# EAGLE board Edge-Lit Clock v3.1 (EAGLE 7.6.0)
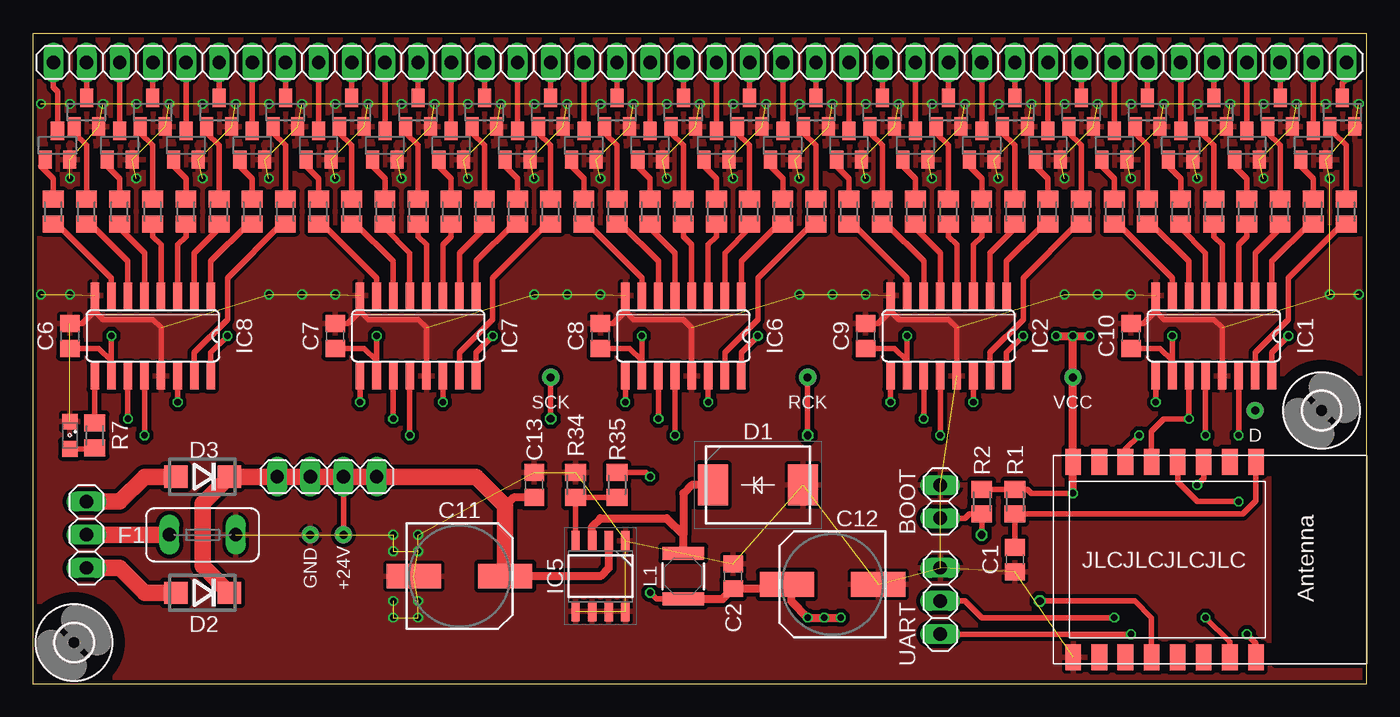
[diagram p0: board, top side]
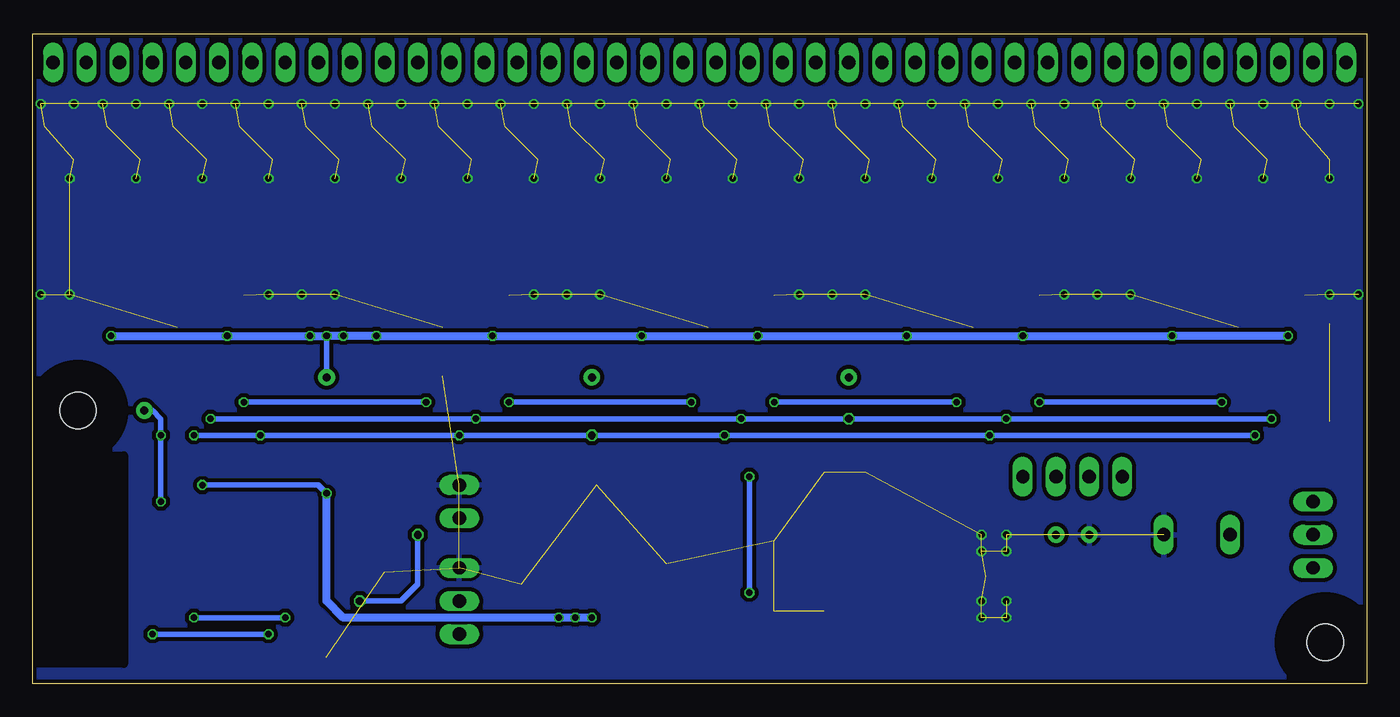
[diagram p1: board, bottom side, seen from below]

Size 102.22 x 49.84 mm. Coordinates in mm from the lower left corner, seen from the top.
Outline: 0,0 102.21,0 102.21,49.84 0,49.84 0,0
Copper layers (1*16): Top 0.035559375mm / dielectric 1.6mm / Bottom 0.035559375mm
Design rules "jlcpcb2layer": minimum track width 5mil, minimum drill 12mil, track to track 5mil, track to pad 5mil, pad to pad 5mil, via to via 5mil, smd to smd 5mil, copper to edge 8mil, drill to drill 6mil, minimum pad ring 5mil, minimum via ring 3mil, stop-mask expansion 2.5mil, vias tented up to drill 0mil, thermal gap 10mil

## Footprints (pad centres in the part's own frame; a part is rotated, then mirrored left to right if it is on the bottom)
PAD-024 = drill 0.61 pad 1.27: 1 0,0
C0805 = smd 1.3 x 1.5: 1 -0.95,0; 2 0.95,0
SANYO-OSCON_SMD_E7 = smd 4.15 x 1.9: + 3.5,0; - -3.5,0
DIOM7959X262N = smd 2.3 x 3.15: 1 -3.45,0; 2 3.45,0
DO214BA = smd 1.8 x 1.7: A 2.05,0; C -2.05,0
TE5 = drill 1.016 long: 1 -2.54,0; 2 2.54,0
2,8 = hole 2.8: 0,0
SO16 = smd 0.66 x 2.032: 1 -4.445,-3.073; 2 -3.175,-3.073; 3 -1.905,-3.073; 4 -0.635,-3.073; 5 0.635,-3.073; 6 1.905,-3.073; 7 3.175,-3.073; 8 4.445,-3.073; 9 4.445,3.073; 10 3.175,3.073; 11 1.905,3.073; 12 0.635,3.073; 13 -0.635,3.073; 14 -1.905,3.073; 15 -3.175,3.073; 16 -4.445,3.073
SOIC127P599X173-8N = smd 1.525 x 0.65: 1 -2.712,1.905; 2 -2.712,0.635; 3 -2.712,-0.635; 4 -2.712,-1.905; 5 2.712,-1.905; 6 2.712,-0.635; 7 2.712,0.635; 8 2.712,1.905
1X03 = drill 1.016 long: 1 -2.54,0; 2 0,0; 3 2.54,0
1X10 = drill 1.016 long: 11 -11.43,0; 12 -8.89,0; 13 -6.35,0; 14 -3.81,0; 15 -1.27,0; 16 1.27,0; 17 3.81,0; 18 6.35,0; 19 8.89,0; 20 11.43,0
1X02 = drill 1.016 long: 1 -1.27,0; 2 1.27,0
1X04 = drill 1.016 long: 1 -3.81,0; 2 -1.27,0; 3 1.27,0; 4 3.81,0
744025150 = smd 1 x 3.2: 1 -1.75,0; 2 1.75,0
SML0805 = smd 1.2 x 1.2: A 1.05,0; C -1.05,0
M0805 = smd 1.3 x 1.6: 1 -0.95,0; 2 0.95,0
SOT23 = smd 1 x 1.4: 1 -0.95,-1.1; 2 0.95,-1.1; 3 0,1.1
ESP-12 = smd 2 x 1.2: 1 -7.5,4.5; 2 -7.5,2.5; 3 -7.5,0.5; 4 -7.5,-1.5; 5 -7.5,-3.5; 6 -7.5,-5.5; 7 -7.5,-7.5; 8 -7.5,-9.5; 9 7.5,-9.5; 10 7.5,-7.5; 11 7.5,-5.5; 12 7.5,-3.5; 13 7.5,-1.5; 14 7.5,0.5; 15 7.5,2.5; 16 7.5,4.5

## Placement (x,y rotation side)
+24V  TPP-PAD-024  [PAD-024]  23.81,11.43 0 top
C1  100n  [C0805]  75.25,9.53 90 top
C2  100n  [C0805]  53.66,8.26 270 top
C6  100n  [C0805]  2.86,26.67 270 top
C7  100n  [C0805]  23.18,26.67 270 top
C8  100n  [C0805]  43.5,26.67 270 top
C9  100n  [C0805]  63.82,26.67 270 top
C10  100n  [C0805]  84.14,26.67 270 top
C11  220/35  [SANYO-OSCON_SMD_E7]  32.7,8.26 0 top
C12  220/10  [SANYO-OSCON_SMD_E7]  61.28,7.62 180 top
C13  100n  [C0805]  38.42,15.24 270 top
D  TPP-PAD-024  [PAD-024]  93.66,20.95 0 top
D1  SS310  [DIOM7959X262N]  55.56,15.24 0 top
D2  GF1M-E3/67A  [DO214BA]  13.02,6.99 180 top
D3  GF1M-E3/67A  [DO214BA]  13.02,15.88 180 top
F1  T0.25  [TE5]  13.02,11.43 0 top
GND  TPP-PAD-024  [PAD-024]  21.27,11.43 0 top
H1  MOUNT-HOLE2.8  [2,8]  98.74,20.95 0 top
H2  MOUNT-HOLE2.8  [2,8]  3.18,3.17 0 top
IC1  74HC595D  [SO16]  90.49,26.67 180 top
IC2  74HC595D  [SO16]  70.17,26.67 180 top
IC5  MIC4680-3.3YM  [SOIC127P599X173-8N]  43.5,8.26 270 top
IC6  74HC595D  [SO16]  49.85,26.67 180 top
IC7  74HC595D  [SO16]  29.53,26.67 180 top
IC8  74HC595D  [SO16]  9.21,26.67 180 top
JP1  UART  [1X03]  69.53,6.35 90 top
JP2  hours 10  [1X10]  89.22,47.62 180 top
JP3  hours 1  [1X10]  63.82,47.62 180 top
JP4  mins 10  [1X10]  38.42,47.62 180 top
JP5  mins 1  [1X10]  13.02,47.62 180 top
JP6  BOOT  [1X02]  69.53,13.97 270 top
JP7  COMMON  [1X04]  22.54,15.88 0 top
JP9  POWER  [1X03]  4.13,11.43 90 top
L1  744025150  [744025150]  49.85,8.26 90 top
LED2  green  [SML0805]  2.86,19.05 270 top
R1  10k  [M0805]  75.25,13.97 90 top
R2  10k  [M0805]  72.71,13.97 90 top
R7  200k  [M0805]  4.76,19.05 270 top
R9  200k  [M0805]  100.65,36.2 270 top
R10  200k  [M0805]  98.11,36.2 270 top
R11  200k  [M0805]  95.57,36.2 270 top
R12  200k  [M0805]  93.03,36.2 270 top
R13  200k  [M0805]  90.49,36.2 270 top
R14  200k  [M0805]  87.95,36.2 270 top
R15  200k  [M0805]  85.41,36.2 270 top
R16  200k  [M0805]  82.87,36.2 270 top
R17  200k  [M0805]  80.33,36.2 270 top
R18  200k  [M0805]  77.79,36.2 270 top
R19  200k  [M0805]  75.25,36.2 270 top
R20  200k  [M0805]  72.71,36.2 270 top
R21  200k  [M0805]  70.17,36.2 270 top
R22  200k  [M0805]  67.63,36.2 270 top
R23  200k  [M0805]  65.09,36.2 270 top
R24  200k  [M0805]  62.55,36.2 270 top
R25  200k  [M0805]  60.01,36.2 270 top
R26  200k  [M0805]  57.47,36.2 270 top
R27  200k  [M0805]  54.93,36.2 270 top
R28  200k  [M0805]  52.39,36.2 270 top
R29  200k  [M0805]  49.85,36.2 270 top
R34  1k78  [M0805]  41.59,15.24 90 top
R35  3k01  [M0805]  44.77,15.24 90 top
R40  200k  [M0805]  47.31,36.2 270 top
R41  200k  [M0805]  44.77,36.2 270 top
R42  200k  [M0805]  42.23,36.2 270 top
R43  200k  [M0805]  39.69,36.2 270 top
R44  200k  [M0805]  37.15,36.2 270 top
R45  200k  [M0805]  34.61,36.2 270 top
R46  200k  [M0805]  32.07,36.2 270 top
R47  200k  [M0805]  29.53,36.2 270 top
R48  200k  [M0805]  26.99,36.2 270 top
R49  200k  [M0805]  24.45,36.2 270 top
R50  200k  [M0805]  21.91,36.2 270 top
R51  200k  [M0805]  19.37,36.2 270 top
R52  200k  [M0805]  16.83,36.2 270 top
R53  200k  [M0805]  14.29,36.2 270 top
R54  200k  [M0805]  11.75,36.2 270 top
R55  200k  [M0805]  9.21,36.2 270 top
R56  200k  [M0805]  6.67,36.2 270 top
R57  200k  [M0805]  4.13,36.2 270 top
R58  200k  [M0805]  1.59,36.2 270 top
RCK  TPP-PAD-024  [PAD-024]  59.37,23.5 0 top
SCK  TPP-PAD-024  [PAD-024]  39.69,23.5 0 top
T1  BC847  [SOT23]  100.33,43.81 0 top
T2  BC847  [SOT23]  98.11,41.27 0 top
T3  BC847  [SOT23]  95.57,43.81 0 top
T4  BC847  [SOT23]  93.03,41.27 0 top
T5  BC847  [SOT23]  90.49,43.81 0 top
T6  BC847  [SOT23]  87.95,41.27 0 top
T7  BC847  [SOT23]  85.41,43.81 0 top
T8  BC847  [SOT23]  82.87,41.27 0 top
T9  BC847  [SOT23]  80.33,43.81 0 top
T10  BC847  [SOT23]  77.79,41.27 0 top
T11  BC847  [SOT23]  75.25,43.81 0 top
T12  BC847  [SOT23]  72.71,41.27 0 top
T13  BC847  [SOT23]  70.17,43.81 0 top
T14  BC847  [SOT23]  67.63,41.27 0 top
T15  BC847  [SOT23]  65.09,43.81 0 top
T16  BC847  [SOT23]  62.55,41.27 0 top
T17  BC847  [SOT23]  60.01,43.81 0 top
T18  BC847  [SOT23]  57.47,41.27 0 top
T19  BC847  [SOT23]  54.93,43.81 0 top
T20  BC847  [SOT23]  52.39,41.27 0 top
T21  BC847  [SOT23]  49.85,43.81 0 top
T32  BC847  [SOT23]  47.31,41.27 0 top
T33  BC847  [SOT23]  44.77,43.81 0 top
T34  BC847  [SOT23]  42.23,41.27 0 top
T35  BC847  [SOT23]  39.69,43.81 0 top
T36  BC847  [SOT23]  37.15,41.27 0 top
T37  BC847  [SOT23]  34.61,43.81 0 top
T38  BC847  [SOT23]  32.07,41.27 0 top
T39  BC847  [SOT23]  29.53,43.81 0 top
T40  BC847  [SOT23]  26.99,41.27 0 top
T41  BC847  [SOT23]  24.45,43.81 0 top
T42  BC847  [SOT23]  21.91,41.27 0 top
T43  BC847  [SOT23]  19.37,43.81 0 top
T44  BC847  [SOT23]  16.83,41.27 0 top
T45  BC847  [SOT23]  14.29,43.81 0 top
T46  BC847  [SOT23]  11.75,41.27 0 top
T47  BC847  [SOT23]  9.21,43.81 0 top
T48  BC847  [SOT23]  6.67,41.27 0 top
T49  BC847  [SOT23]  4.13,43.81 0 top
T50  BC847  [SOT23]  1.91,41.27 0 top
VCC  TPP-PAD-024  [PAD-024]  79.69,23.5 0 top
X1  ESP12  [ESP-12]  89.22,9.53 270 top

## Library data of the parts
+24V D GND RCK SCK VCC = testpoint
C1 C2 C6-C13 R1 R2 R7 R9-R29 R34 R35 R40-R58 = rcl
D1 = SS310; DESCRIPTION: TAIWAN SEMICONDUCTOR - SS310 - SCHOTTKY RECTIFIER, 3A, 100V, DO-214AB; HEIGHT: 2.62mm; MANUFACTURER_NAME: Taiwan Semiconductor; MANUFACTURER_PART_NUMBER: SS310; MOUSER_PART_NUMBER: 821-SS310; MOUSER_PRICE-STOCK: https://www.mouser.co.uk/ProductDetail/Taiwan-Semiconductor/SS310?qs=tHU%2FlV7kTyQnmIwIRiOFBw%3D%3D
D2 D3 = diode
F1 = fuse; OC_FARNELL: unknown; OC_NEWARK: unknown
H1 H2 = holes
IC1 IC2 IC6-IC8 = 74xx-eu
IC5 = MIC4680-3.3YM; ARROW_PART_NUMBER: MIC4680-3.3YM; ARROW_PRICE-STOCK: https://www.arrow.com/en/products/mic4680-3.3ym/microchip-technology; DESCRIPTION: MICREL SEMICONDUCTOR - MIC4680-3.3YM - BUCK, 4-34VIN, 1.3A, 200KHZ, 3.3V, 8SOIC; HEIGHT: 1.73mm; MANUFACTURER_NAME: Microchip; MANUFACTURER_PART_NUMBER: MIC4680-3.3YM; MOUSER_PART_NUMBER: 998-MIC4680-3.3YM; MOUSER_PRICE-STOCK: https://www.mouser.co.uk/ProductDetail/Microchip-Technology-Micrel/MIC4680-33YM?qs=kh6iOki%2FeLEl7qvTxSy9RA%3D%3D
JP1-JP7 JP9 = pinhead
L1 = inductor-wurth
LED2 = led
T1-T21 T32-T50 = transistor
X1 = adafruit

## Nets
+24V: +24V.1 C11.+ C13.2 D2.C D3.C IC5.2 JP7.1 JP7.2 JP7.3 JP7.4
CLOCK: IC1.11 IC2.11 IC6.11 IC7.11 IC8.11 SCK.1 X1.5
DATA: D.1 IC1.14 X1.4
GND: C1.1 C2.1 C6.1 C7.1 C8.1 C9.1 C10.1 C11.- C12.- C13.1 D1.2 F1.2 GND.1 IC1.8 IC1.13 IC2.8 IC2.13 IC5.1 IC5.5 IC5.6 IC5.7 IC5.8 IC6.8 IC6.13 IC7.8 IC7.13 IC8.8 IC8.13 JP1.3 JP6.1 LED2.C R34.2 T1.2 T2.2 T3.2 T4.2 T5.2 T6.2 T7.2 T8.2 T9.2 T10.2 T11.2 T12.2 T13.2 T14.2 T15.2 T16.2 T17.2 T18.2 T19.2 T20.2 T21.2 T32.2 T33.2 T34.2 T35.2 T36.2 T37.2 T38.2 T39.2 T40.2 T41.2 T42.2 T43.2 T44.2 T45.2 T46.2 T47.2 T48.2 T49.2 T50.2 X1.9
N$1: R9.1 T1.1
N$2: R10.1 T2.1
N$3: R11.1 T3.1
N$4: R12.1 T4.1
N$5: R13.1 T5.1
N$6: R14.1 T6.1
N$7: R15.1 T7.1
N$8: R16.1 T8.1
N$9: R17.1 T9.1
N$10: IC6.9 IC7.14
N$11: IC1.15 R9.2
N$12: IC1.1 R10.2
N$13: IC1.2 R11.2
N$14: C1.2 R1.1 X1.1
N$15: IC1.3 R12.2
N$16: JP6.2 R2.1 X1.12
N$17: IC1.4 R13.2
N$18: JP1.1 X1.16
N$19: IC1.5 R14.2
N$20: IC1.6 R15.2
N$21: IC1.7 R16.2
N$22: IC2.15 R17.2
N$23: JP2.14 T4.3
N$24: JP1.2 X1.15
N$25: IC2.9 IC6.14
N$26: JP2.15 T5.3
N$27: JP2.13 T3.3
N$28: JP2.12 T2.3
N$29: JP2.11 T1.3
N$30: JP2.16 T6.3
N$31: JP2.17 T7.3
N$32: JP2.18 T8.3
N$33: JP2.19 T9.3
N$34: R18.1 T10.1
N$35: IC2.1 R18.2
N$36: JP2.20 T10.3
N$37: IC1.12 IC2.12 IC6.12 IC7.12 IC8.12 RCK.1 X1.6
N$38: D3.A JP9.3
N$39: R19.1 T11.1
N$40: R20.1 T12.1
N$41: R21.1 T13.1
N$42: R22.1 T14.1
N$43: R23.1 T15.1
N$44: R24.1 T16.1
N$45: R25.1 T17.1
N$46: IC7.9 IC8.14
N$47: R26.1 T18.1
N$48: R27.1 T19.1
N$49: IC2.2 R19.2
N$50: IC2.3 R20.2
N$51: IC2.4 R21.2
N$52: IC2.5 R22.2
N$53: IC2.6 R23.2
N$54: IC2.7 R24.2
N$56: IC6.15 R25.2
N$57: IC6.1 R26.2
N$58: IC6.2 R27.2
N$59: JP3.14 T14.3
N$60: JP3.15 T15.3
N$61: JP3.13 T13.3
N$62: JP3.12 T12.3
N$63: JP3.11 T11.3
N$64: IC1.9 IC2.14
N$65: JP3.16 T16.3
N$66: JP3.17 T17.3
N$67: JP3.18 T18.3
N$68: JP3.19 T19.3
N$69: R28.1 T20.1
N$70: IC6.3 R28.2
N$71: JP3.20 T20.3
N$72: D2.A JP9.1
N$73: F1.1 JP9.2
N$74: JP4.14 T34.3
N$75: JP4.15 T35.3
N$76: JP4.13 T33.3
N$77: R29.1 T21.1
N$78: R40.1 T32.1
N$79: R41.1 T33.1
N$80: R42.1 T34.1
N$81: R43.1 T35.1
N$82: R44.1 T36.1
N$83: R45.1 T37.1
N$85: R46.1 T38.1
N$87: R47.1 T39.1
N$88: IC6.4 R29.2
N$89: IC6.5 R40.2
N$90: IC6.6 R41.2
N$91: IC6.7 R42.2
N$92: IC7.15 R43.2
N$93: IC7.1 R44.2
N$94: IC7.2 R45.2
N$95: IC7.3 R46.2
N$96: LED2.A R7.2
N$102: IC7.4 R47.2
N$103: JP4.12 T32.3
N$104: JP4.11 T21.3
N$105: JP4.16 T36.3
N$106: JP4.17 T37.3
N$107: JP4.18 T38.3
N$108: JP4.19 T39.3
N$109: JP4.20 T40.3
N$110: JP5.14 T44.3
N$111: JP5.15 T45.3
N$112: R48.1 T40.1
N$113: IC7.5 R48.2
N$114: JP5.13 T43.3
N$115: JP5.12 T42.3
N$116: JP5.11 T41.3
N$117: JP5.16 T46.3
N$118: JP5.17 T47.3
N$119: JP5.18 T48.3
N$120: JP5.19 T49.3
N$121: R49.1 T41.1
N$122: R50.1 T42.1
N$123: R51.1 T43.1
N$124: R52.1 T44.1
N$125: R53.1 T45.1
N$126: R54.1 T46.1
N$127: R55.1 T47.1
N$128: R56.1 T48.1
N$129: R57.1 T49.1
N$130: IC7.6 R49.2
N$131: IC7.7 R50.2
N$132: IC8.15 R51.2
N$133: IC8.1 R52.2
N$134: IC8.2 R53.2
N$135: IC8.3 R54.2
N$136: IC8.4 R55.2
N$137: IC8.5 R56.2
N$138: IC8.6 R57.2
N$139: JP5.20 T50.3
N$140: D1.1 IC5.3 L1.2
N$141: IC5.4 R34.1 R35.1
N$142: IC8.9 R7.1
N$178: R58.1 T50.1
N$179: IC8.7 R58.2
VCC: C2.2 C6.2 C7.2 C8.2 C9.2 C10.2 C12.+ IC1.10 IC1.16 IC2.10 IC2.16 IC6.10 IC6.16 IC7.10 IC7.16 IC8.10 IC8.16 L1.1 R1.2 R2.2 R35.2 VCC.1 X1.3 X1.8

## Tracks (layer width: path | path; a pad name or v marks a point on that pad's centre or on a via)
+24V
  Top 0.406: +24V.1 23.81,15.24 24.45,15.88
  Top 0.61: IC5.2 44.13,8.89 43.5,8.26 C11.+ | C13.2 36.85,14.29 36.2,13.64
  Top 1.27: C11.+ 36.2,13.64 33.97,15.88 JP7.4 24.45,15.88 JP7.3 JP7.2 JP7.1 D3.C 13.02,13.82 13.02,9.04 D2.C
CLOCK  (via drill 0.5, 0.6)
  Top 0.406: IC7.11 v27.62,20.32 | v7.3,20.32 IC8.11 | IC6.11 v47.94,20.32 | IC2.11 v68.26,20.32 | IC1.11 v88.58,20.32 86.68,20.32 85.72,19.36 X1.5 | SCK.1 v39.69,20.32
  Bottom 0.406: v7.3,20.32 v27.62,20.32 v39.69,20.32 47.31,20.32 v47.94,20.32 v68.26,20.32 v88.58,20.32
DATA  (via drill 0.5)
  Top 0.406: IC1.14 v92.39,19.05 | v92.39,13.97 89.22,13.97 87.72,15.47 X1.4
  Bottom 0.406: v92.39,13.97 v92.39,19.05 92.39,20.32 93.03,20.95 D.1
GND  (via drill 0.5)  (147 unrouted)
  Top 0.406: 86.04,28.57 85.09,27.62 C10.1 | 86.04,28.57 IC1.8 | 65.72,28.57 IC2.8 | 45.4,28.57 44.45,27.62 C8.1 | 45.4,28.57 IC6.8 | 25.08,28.57 IC7.8 | 25.08,28.57 25.72,27.94 29.53,27.94 30.16,27.3 IC7.13 | 45.4,28.57 46.04,27.94 49.85,27.94 50.48,27.3 IC6.13 | 4.76,28.57 3.81,27.62 C6.1 | 4.76,28.57 IC8.8 | 4.76,28.57 5.4,27.94 9.21,27.94 9.84,27.3 IC8.13 | 86.04,28.57 86.68,27.94 90.49,27.94 91.12,27.3 IC1.13 | 65.72,28.57 66.36,27.94 70.17,27.94 70.8,27.3 IC2.13 | C7.1 24.13,27.62 25.08,28.57 | C9.1 64.77,27.62 65.72,28.57
  other vias: 99.06,44.45 101.6,44.45 91.76,44.45 89.22,44.45 86.68,44.45 84.14,44.45 81.6,44.45 79.06,44.45 76.52,44.45 73.98,44.45 71.44,44.45 68.9,44.45 66.36,44.45 63.82,44.45 61.28,44.45 58.74,44.45 56.2,44.45 53.66,44.45 51.12,44.45 48.58,44.45 46.04,44.45 43.5,44.45 40.96,44.45 38.42,44.45 35.88,44.45 33.34,44.45 30.8,44.45 28.26,44.45 25.72,44.45 23.18,44.45 20.64,44.45 18.1,44.45 15.56,44.45 13.02,44.45 10.48,44.45 7.94,44.45 5.4,44.45 2.86,44.45 0.64,44.45 94.3,44.45 96.84,44.45 2.86,38.73 7.94,38.73 13.02,38.73 18.1,38.73 23.18,38.73 28.26,38.73 33.34,38.73 38.42,38.73 99.38,38.73 94.3,38.73 89.22,38.73 84.14,38.73 79.06,38.73 73.98,38.73 68.9,38.73 63.82,38.73 58.74,38.73 53.66,38.73 48.58,38.73 43.5,38.73 2.86,29.84 23.18,29.84 43.5,29.84 63.82,29.84 84.14,29.84 29.53,11.43 29.53,10.16 29.53,6.35 29.53,5.08 27.62,5.08 27.62,6.35 27.62,10.16 27.62,11.43 18.1,29.84 38.42,29.84 58.74,29.84 79.06,29.84 99.38,29.84 81.6,29.84 101.6,29.84 61.28,29.84 40.96,29.84 20.64,29.84 0.64,29.84
  pour Top (isolate 0.305): -0.95,50.8 103.19,50.8 103.19,-1.27 -0.95,-1.27
  pour Bottom (isolate 0.305): -0.95,50.8 103.19,50.8 103.19,-1.27 -0.95,-1.27
N$1
  Top 0.406: T1.1 99.7,42.23 100.65,41.27 R9.1
N$2
  Top 0.406: T2.1 97.16,39.69 98.11,38.73 R10.1
N$3
  Top 0.406: T3.1 94.62,42.23 95.57,41.27 R11.1
N$4
  Top 0.406: T4.1 92.08,39.69 93.03,38.73 R12.1
N$5
  Top 0.406: T5.1 89.54,42.23 90.49,41.27 R13.1
N$6
  Top 0.406: T6.1 87,39.69 87.95,38.73 R14.1
N$7
  Top 0.406: T7.1 84.46,42.23 85.41,41.27 R15.1
N$8
  Top 0.406: T8.1 81.92,39.69 82.87,38.73 R16.1
N$9
  Top 0.406: T9.1 79.38,42.23 80.33,41.27 R17.1
N$10  (via drill 0.5)
  Top 0.406: v45.4,21.59 IC6.9 | v31.43,21.59 IC7.14
  Bottom 0.406: v45.4,21.59 v31.43,21.59
N$11
  Top 0.406: IC1.15 93.66,25.4 96.2,27.94 96.2,31.11 100.33,35.24 R9.2
N$12
  Top 0.406: R10.2 97.79,35.24 94.93,32.38 IC1.1
N$13
  Top 0.406: R11.2 95.57,34.92 93.66,33.02 IC1.2
N$14
  Top 0.406: C1.2 R1.1 92.71,13.02 93.72,14.03 X1.1
N$15
  Top 0.406: R12.2 93.03,34.29 92.39,33.66 IC1.3
N$16  (via drill 0.6)
  Top 0.406: X1.12 85.72,5.08 84.45,6.35 v77.15,6.35 | JP6.2 71.44,12.7 71.76,13.02 R2.1 v72.71,11.43
  Bottom 0.406: v72.71,11.43 72.71,7.62 73.98,6.35 v77.15,6.35
N$17
  Top 0.406: R13.2 90.49,34.29 91.12,33.66 IC1.4
N$18  (via drill 0.5)
  Top 0.406: JP1.1 v84.14,3.81 | X1.16 93.72,3.12 v93.03,3.81
  Bottom 0.406: v84.14,3.81 v93.03,3.81
N$19
  Top 0.406: R14.2 87.95,34.92 89.85,33.02 IC1.5
N$20
  Top 0.406: R15.2 85.72,35.24 88.58,32.38 IC1.6
N$21
  Top 0.406: R16.2 83.18,35.24 87.31,31.11 IC1.7
N$22
  Top 0.406: IC2.15 73.34,25.4 75.88,27.94 75.88,31.11 80.01,35.24 R17.2
N$23
  Top 0.406: JP2.14 T4.3
N$24  (via drill 0.5)
  Top 0.406: 91.72,1.23 X1.15 91.72,3.21 v89.85,5.08 | v82.87,5.08 72.71,5.08 71.44,6.35 JP1.2
  Bottom 0.406: v89.85,5.08 v82.87,5.08
N$25  (via drill 0.5)
  Top 0.406: v65.72,21.59 IC2.9 | v51.75,21.59 IC6.14
  Bottom 0.406: v65.72,21.59 v51.75,21.59
N$26
  Top 0.406: JP2.15 T5.3
N$27
  Top 0.406: T3.3 JP2.13
N$28
  Top 0.406: JP2.12 T2.3
N$29
  Top 0.406: T1.3 100.33,46.04 100.65,46.35 JP2.11
N$30
  Top 0.406: T6.3 JP2.16
N$31
  Top 0.406: JP2.17 T7.3
N$32
  Top 0.406: T8.3 JP2.18
N$33
  Top 0.406: JP2.19 T9.3
N$34
  Top 0.406: T10.1 76.84,39.69 77.79,38.73 R18.1
N$35
  Top 0.406: R18.2 77.47,35.24 74.61,32.38 IC2.1
N$36
  Top 0.406: T10.3 JP2.20
N$37  (via drill 0.5, 0.6)
  Top 0.406: IC8.12 v8.57,19.05 | v28.89,19.05 IC7.12 | IC6.12 v49.21,19.05 | IC2.12 v69.53,19.05 | v89.85,19.05 IC1.12 | X1.6 83.72,18 v84.77,19.05 | RCK.1 v59.37,19.05
  Bottom 0.406: v8.57,19.05 v28.89,19.05 v49.21,19.05 v59.37,19.05 v69.53,19.05 v84.77,19.05 v89.85,19.05
N$38
  Top 1.27: JP9.3 6.67,13.97 8.57,15.88 D3.A
N$39
  Top 0.406: T11.1 74.3,42.23 75.25,41.27 R19.1
N$40
  Top 0.406: T12.1 71.76,39.69 72.71,38.73 R20.1
N$41
  Top 0.406: T13.1 69.22,42.23 70.17,41.27 R21.1
N$42
  Top 0.406: T14.1 66.68,39.69 67.63,38.73 R22.1
N$43
  Top 0.406: T15.1 64.14,42.23 65.09,41.27 R23.1
N$44
  Top 0.406: T16.1 61.6,39.69 62.55,38.73 R24.1
N$45
  Top 0.406: T17.1 59.06,42.23 60.01,41.27 R25.1
N$46  (via drill 0.5)
  Top 0.406: IC7.9 v25.08,21.59 | v11.11,21.59 IC8.14
  Bottom 0.406: v25.08,21.59 v11.11,21.59
N$47
  Top 0.406: T18.1 56.52,39.69 57.47,38.73 R26.1
N$48
  Top 0.406: T19.1 53.98,42.23 54.93,41.27 R27.1
N$49
  Top 0.406: R19.2 75.25,34.92 73.34,33.02 IC2.2
N$50
  Top 0.406: R20.2 72.71,34.29 72.07,33.66 IC2.3
N$51
  Top 0.406: R21.2 70.17,34.29 70.8,33.66 IC2.4
N$52
  Top 0.406: R22.2 67.63,34.92 69.53,33.02 IC2.5
N$53
  Top 0.406: R23.2 65.4,35.24 68.26,32.38 IC2.6
N$54
  Top 0.406: R24.2 62.86,35.24 66.99,31.11 IC2.7
N$56
  Top 0.406: IC6.15 53.02,25.4 55.56,27.94 55.56,31.11 59.69,35.24 R25.2
N$57
  Top 0.406: R26.2 57.15,35.24 54.29,32.38 IC6.1
N$58
  Top 0.406: R27.2 54.93,34.92 53.02,33.02 IC6.2
N$59
  Top 0.406: JP3.14 T14.3
N$60
  Top 0.406: T15.3 JP3.15
N$61
  Top 0.406: T13.3 JP3.13
N$62
  Top 0.406: T12.3 JP3.12
N$63
  Top 0.406: JP3.11 T11.3
N$64  (via drill 0.5)
  Top 0.406: IC1.9 v86.04,21.59 | v72.07,21.59 IC2.14
  Bottom 0.406: v86.04,21.59 v72.07,21.59
N$65
  Top 0.406: JP3.16 T16.3
N$66
  Top 0.406: T17.3 JP3.17
N$67
  Top 0.406: JP3.18 T18.3
N$68
  Top 0.406: T19.3 JP3.19
N$69
  Top 0.406: T20.1 51.44,39.69 52.39,38.73 R28.1
N$70
  Top 0.406: R28.2 52.39,34.29 51.75,33.66 IC6.3
N$71
  Top 0.406: JP3.20 T20.3
N$72
  Top 1.27: D2.A 8.57,6.99 6.67,8.89 JP9.1
N$73
  Top 1.27: JP9.2 F1.1
N$74
  Top 0.406: T34.3 JP4.14
N$75
  Top 0.406: T35.3 JP4.15
N$76
  Top 0.406: JP4.13 T33.3
N$77
  Top 0.406: T21.1 48.9,42.23 49.85,41.27 R29.1
N$78
  Top 0.406: T32.1 46.36,39.69 47.31,38.73 R40.1
N$79
  Top 0.406: T33.1 43.82,42.23 44.77,41.27 R41.1
N$80
  Top 0.406: T34.1 41.28,39.69 42.23,38.73 R42.1
N$81
  Top 0.406: T35.1 38.74,42.23 39.69,41.27 R43.1
N$82
  Top 0.406: T36.1 36.2,39.69 37.15,38.73 R44.1
N$83
  Top 0.406: T37.1 33.66,42.23 34.61,41.27 R45.1
N$85
  Top 0.406: T38.1 31.12,39.69 32.07,38.73 R46.1
N$87
  Top 0.406: T39.1 28.58,42.23 29.53,41.27 R47.1
N$88
  Top 0.406: R29.2 49.85,34.29 50.48,33.66 IC6.4
N$89
  Top 0.406: R40.2 47.31,34.92 49.21,33.02 IC6.5
N$90
  Top 0.406: R41.2 45.08,35.24 47.94,32.38 IC6.6
N$91
  Top 0.406: R42.2 42.54,35.24 46.67,31.11 IC6.7
N$92
  Top 0.406: IC7.15 32.7,25.4 35.24,27.94 35.24,31.11 39.37,35.24 R43.2
N$93
  Top 0.406: R44.2 36.83,35.24 33.97,32.38 IC7.1
N$94
  Top 0.406: R45.2 34.61,34.92 32.7,33.02 IC7.2
N$95
  Top 0.406: R46.2 32.07,34.29 31.43,33.66 IC7.3
N$96
  Top 0.406: LED2.A 4.66,18 R7.2
N$102
  Top 0.406: R47.2 29.53,34.29 30.16,33.66 IC7.4
N$103
  Top 0.406: JP4.12 T32.3
N$104
  Top 0.406: T21.3 JP4.11
N$105
  Top 0.406: JP4.16 T36.3
N$106
  Top 0.406: T37.3 JP4.17
N$107
  Top 0.406: JP4.18 T38.3
N$108
  Top 0.406: T39.3 JP4.19
N$109
  Top 0.406: JP4.20 T40.3
N$110
  Top 0.406: JP5.14 T44.3
N$111
  Top 0.406: T45.3 JP5.15
N$112
  Top 0.406: T40.1 26.04,39.69 26.99,38.73 R48.1
N$113
  Top 0.406: R48.2 26.99,34.92 28.89,33.02 IC7.5
N$114
  Top 0.406: JP5.13 T43.3
N$115
  Top 0.406: JP5.12 T42.3
N$116
  Top 0.406: T41.3 JP5.11
N$117
  Top 0.406: JP5.16 T46.3
N$118
  Top 0.406: JP5.17 T47.3
N$119
  Top 0.406: JP5.18 T48.3
N$120
  Top 0.406: T49.3 JP5.19
N$121
  Top 0.406: T41.1 23.5,42.23 24.45,41.27 R49.1
N$122
  Top 0.406: T42.1 20.96,39.69 21.91,38.73 R50.1
N$123
  Top 0.406: T43.1 18.42,42.23 19.37,41.27 R51.1
N$124
  Top 0.406: T44.1 15.88,39.69 16.83,38.73 R52.1
N$125
  Top 0.406: T45.1 13.34,42.23 14.29,41.27 R53.1
N$126
  Top 0.406: T46.1 10.8,39.69 11.75,38.73 R54.1
N$127
  Top 0.406: T47.1 8.26,42.23 9.21,41.27 R55.1
N$128
  Top 0.406: T48.1 5.72,39.69 6.67,38.73 R56.1
N$129
  Top 0.406: T49.1 3.18,42.23 4.13,41.27 R57.1
N$130
  Top 0.406: R49.2 24.76,35.24 27.62,32.38 IC7.6
N$131
  Top 0.406: R50.2 22.22,35.24 26.35,31.11 IC7.7
N$132
  Top 0.406: IC8.15 12.38,25.4 14.92,27.94 14.92,31.11 19.05,35.24 R51.2
N$133
  Top 0.406: R52.2 16.51,35.24 13.65,32.38 IC8.1
N$134
  Top 0.406: R53.2 14.29,34.92 12.38,33.02 IC8.2
N$135
  Top 0.406: R54.2 11.75,34.29 11.11,33.66 IC8.3
N$136
  Top 0.406: R55.2 9.21,34.29 9.84,33.66 IC8.4
N$137
  Top 0.406: R56.2 6.67,34.92 8.57,33.02 IC8.5
N$138
  Top 0.406: R57.2 4.44,35.24 7.3,32.38 IC8.6
N$139
  Top 0.406: JP5.20 1.59,45.72 1.91,45.4 T50.3
N$140
  Top 0.61: IC5.3 42.86,12.06 43.5,12.7 48.58,12.7 49.85,11.43 | L1.2 49.85,11.43 | D1.1 50.48,15.24 49.85,14.61 49.85,11.43
N$141
  Top 0.406: IC5.4 R34.1 R35.1
N$142
  Top 0.406: R7.1 IC8.9
N$178
  Top 0.406: T50.1 0.64,39.69 1.59,38.73 R58.1
N$179
  Top 0.406: R58.2 1.9,35.24 6.03,31.11 IC8.7
VCC  (via drill 0.5)
  Top 0.406: v6.03,26.67 IC8.10 6.03,24.77 5.08,25.72 C6.2 | v14.92,26.67 13.65,25.4 IC8.16 | v46.67,26.67 IC6.10 46.67,24.77 45.72,25.72 C8.2 | IC7.16 33.97,25.4 v35.24,26.67 | v26.35,26.67 IC7.10 26.35,24.77 25.4,25.72 C7.2 | v66.99,26.67 IC2.10 66.99,24.77 66.04,25.72 C9.2 | IC2.16 74.61,25.4 v75.88,26.67 | v87.31,26.67 IC1.10 87.31,24.77 86.36,25.72 C10.2 | IC6.16 54.29,25.4 v55.56,26.67 | IC1.16 94.93,25.4 v96.2,26.67 | L1.1 47.79,6.5 v47.31,6.99 | R35.2 46.99,16.19 v47.31,15.88 | R2.2 R1.2 76.2,14.92 76.52,14.61 v79.69,14.61 79.72,14.63 X1.8 | X1.3 89.72,15.74 v89.22,15.24 | 58.1,7.62 C12.+
  Top 0.61: L1.1 52.86,6.5 C2.2 57.46,7.3 C12.+ | 58.1,7.62 58.1,6.35 v59.37,5.08 v61.91,5.08 | v79.69,14.61 v79.69,26.67 | v78.42,26.67 v79.69,26.67 | v79.69,26.67 v80.96,26.67
  Bottom 0.406: v47.31,6.99 v47.31,15.88 | v89.22,15.24 80.33,15.24 v79.69,14.61 | VCC.1 v79.69,26.67
  Bottom 0.61: v6.03,26.67 v14.92,26.67 v26.35,26.67 v35.24,26.67 v46.67,26.67 v55.56,26.67 v66.99,26.67 v75.88,26.67 v79.69,26.67 v87.31,26.67 v96.2,26.67 | v79.69,14.61 79.69,6.35 78.42,5.08 v61.91,5.08 v60.64,5.08 v59.37,5.08

## Text on the board
tPlace: JLCJLCJLCJLC